# Altium PCB PES_BOARD_V2023.PcbDoc (part 2 of 3)
Units mm, origin at the board's own origin, x right, y up, seen from the top; angles counter-clockwise.
Board outline 110.62 x 70.82 mm, 2 copper layers (Top Layer, Bottom Layer), stack 0.325 mm thick; 197 components, 152 nets, 714 pads, 351 vias.
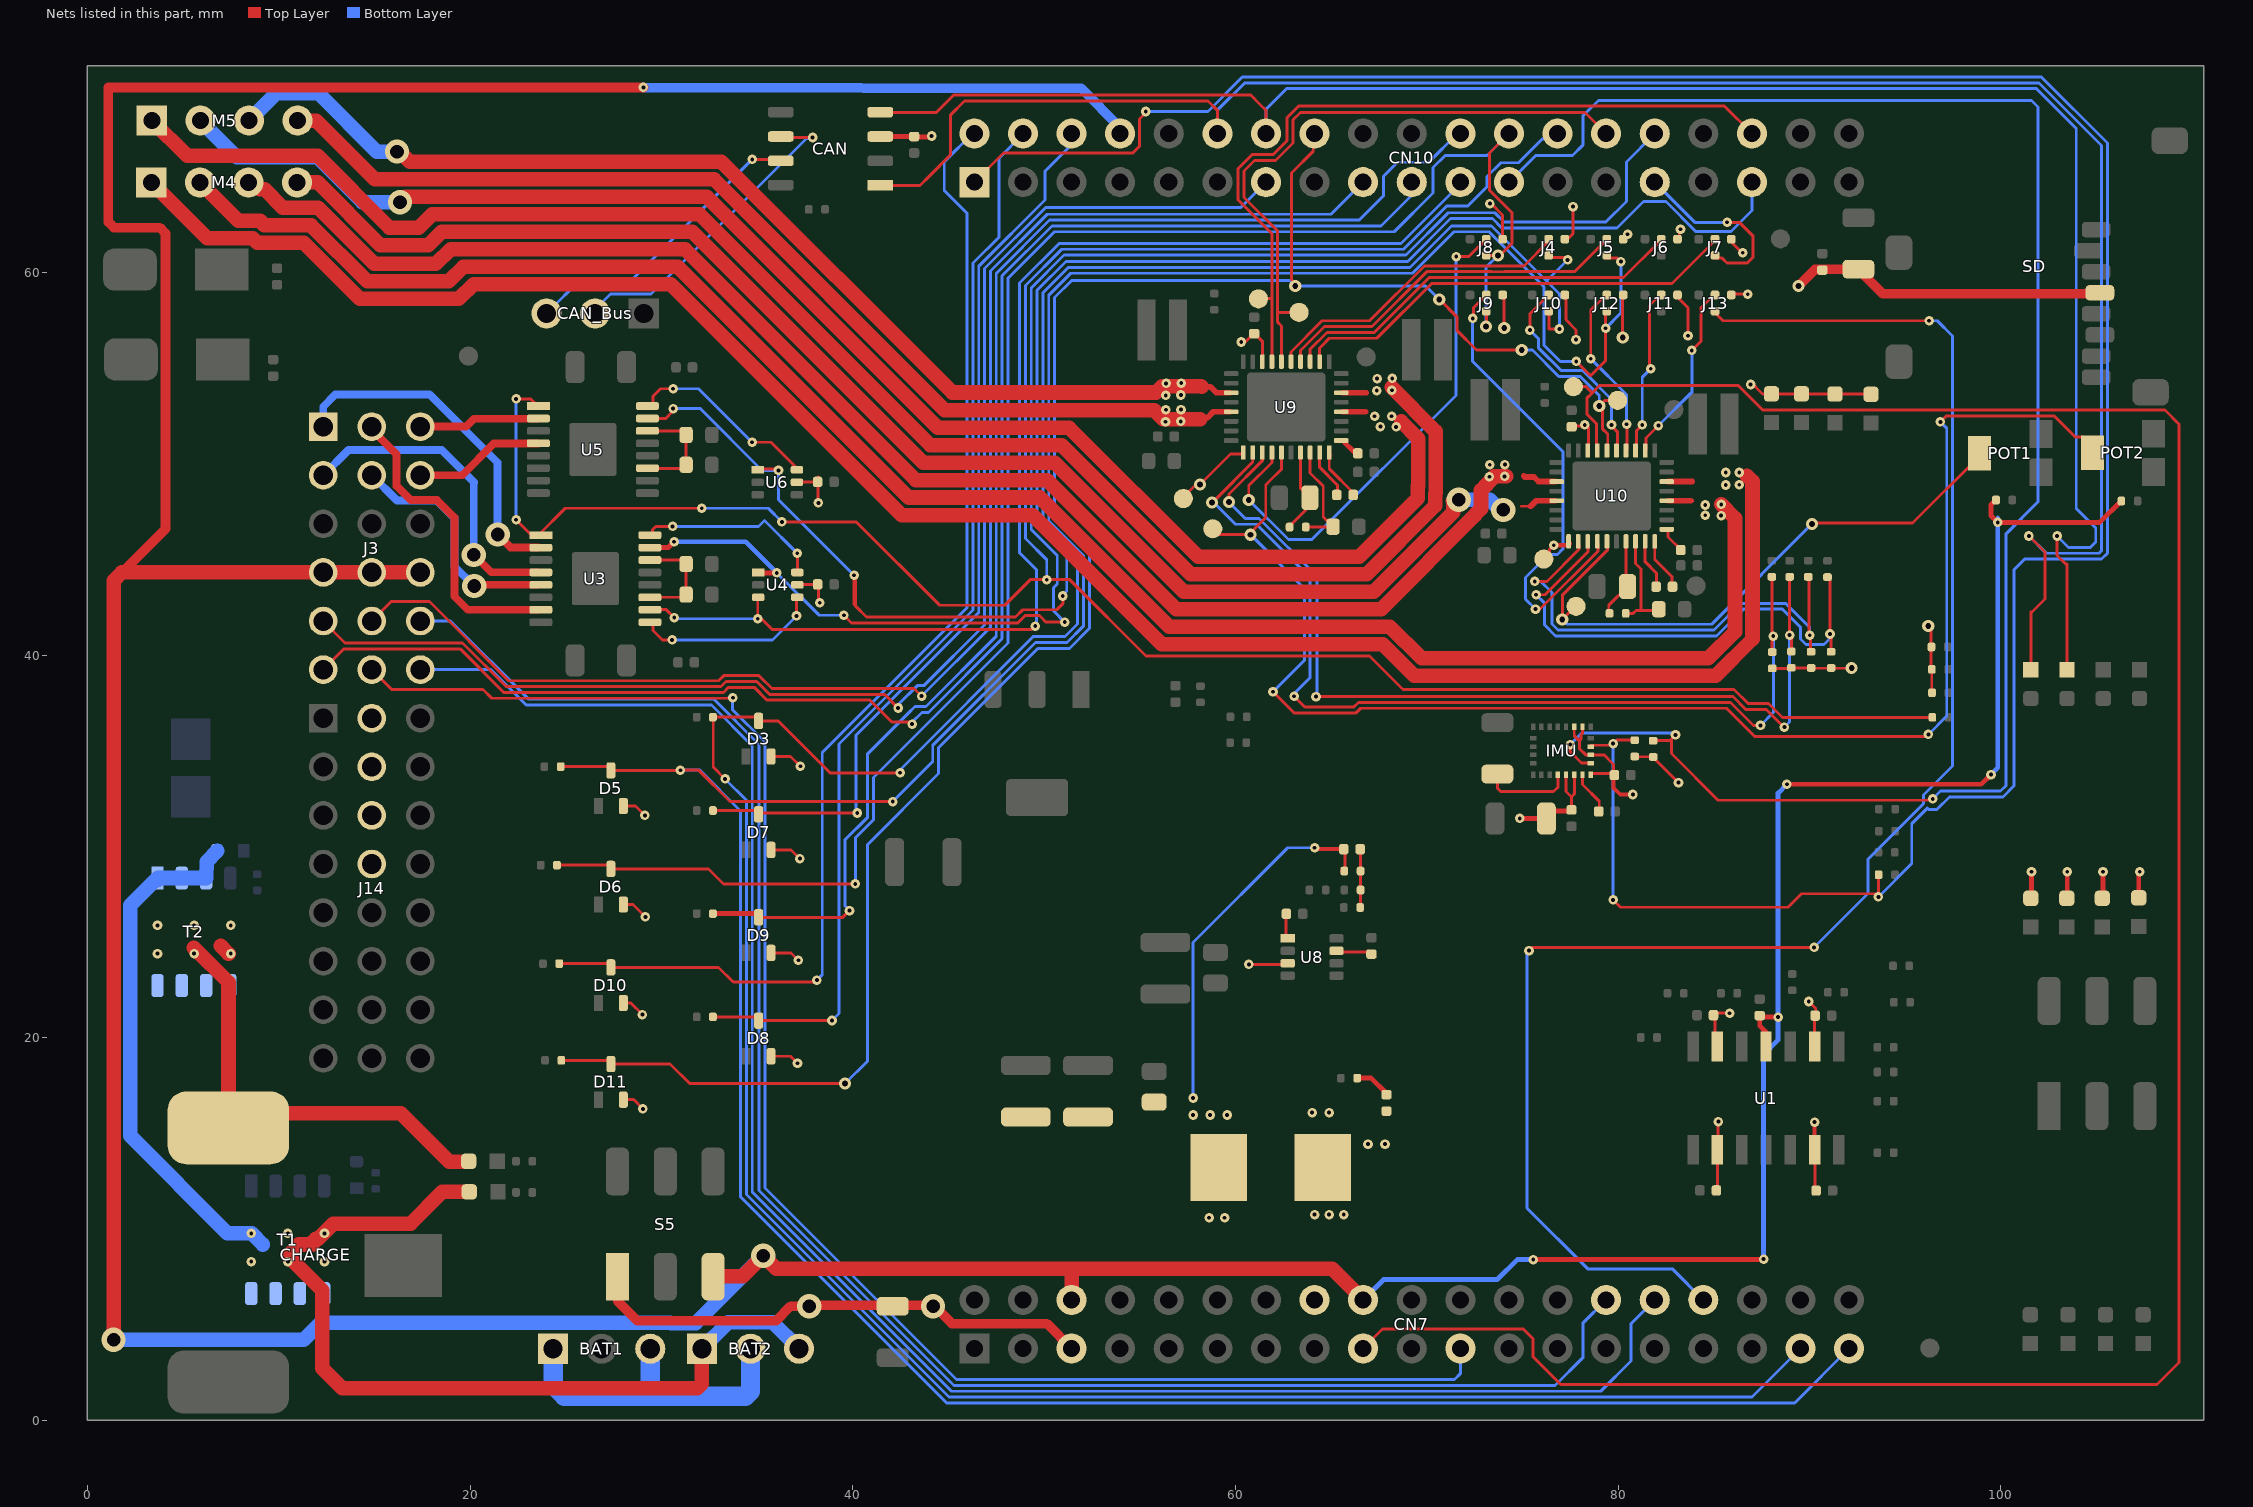
[diagram p2: the nets of this part, all layers, seen from the top]

## Part data (continued)
U9 U10: library part CMP-00364-3, "Stepper Motor Driver, 1Ch, 3..5.5V, Power 4.75..46V, 2A, QFN-36", Case/Package=QFN-36, Max Current=2A, Max Logic Voltage=5.25V, Max Power Voltage=46V, Min Logic Voltage=3V, Min Power Voltage=5.5V, Channels=1, Function="Stepper Motor Driver", Mounting Technology=SMD
ZD1 ZD2: library part CMP-004-00080-9, "Zener Diode, 13.25V±0.85V, 5mA, 30R, 500mW, SOD-523-2", Case/Package=SOD-523-2, Current=100nA, Power=500mW, Voltage=13.25V, Mounting Technology=SMD, Type=Zener

## Via types
v1: diameter 0.5, hole 0.2, Top Layer to Bottom Layer, 294 vias
v2: diameter 0.635, hole 0.305, Top Layer to Bottom Layer, 30 vias
v3: diameter 1.27, hole 0.711, Top Layer to Bottom Layer, 23 vias
v4: diameter 4.5, hole 3.5, Top Layer to Bottom Layer, 3 vias
v5: diameter 0.5, hole 0.2, Top Layer to Bottom Layer, tented both sides, 1 vias

## Nets (pads, with @x,y where several pads share a name; then routed paths per layer and width w, separated by ;. In a path a pad name is that pad's centre, name@x,y a point inside that pad or via, vN(x,y) a via of type N, cw(c..) or ccw(c..) an arc to the next point about the centre after c; other vN are vias at no path point)
3V3: 8_VCC_IO.1 8_VCC_IO_2.1 "DRV ERR 1.2" "DRV ERR 2.2" "IMU SDA.2" "IND PLS 1.2" "IND PLS 2.2" "SD CS.2" "SD MISO.2" "SD MOSI.2" C2.2 C11.1 C12.2 C13.1 C15.2 C19.1 C25.1 C36.1 C37.1 C48.1 C49.1 C50.1 C52.1 C61.1 C202.1 CAN.3 CN7.5 CN7.16 D3.2 D5.2 D6.2 D7.2 D8.2 D9.2 D10.2 D11.2 IMU.1 IMU.3 IMU.7 IMU.8 IMU.22 IMU.23 J4.4 J5.4 J6.4 J7.4 J8.4 J9.4 J10.4 J11.4 J12.4 J13.4 J14.2 J14.5 J14.8 J14.11 R2.2 R3.1 R7.2 R19.1 R21.1 R33.1 R34.1 R65.1 R66.1 S5.1 SD.4 U1.2 U1.6 U1.9 U1.13 U4.5 U6.5 U9.8 U9.19 U10.8 U10.19 | length 137.1
  Top Layer w0.152: D11.2@28.006,16.766 28.547,16.766 v1(29.032,16.281) ; D10.2@28.006,21.82 28.396,21.82 v1(29.007,21.209) ; D6.2@28.006,26.968 28.506,26.968 v1(29.159,26.314) ; D5.2@28.006,32.115 28.641,32.115 v1(29.134,31.623) ; D8.2@35.727,19.034 36.744,19.034 v1(37.109,18.669) ; D9.2@35.727,24.437 36.777,24.437 v1(37.16,24.054) ; D7.2@35.727,29.822 36.777,29.822 v1(37.236,29.362) ; D3.2@35.727,34.706 36.744,34.706 v1(37.262,34.188) ; U4.5@37.102,43.671 37.127,43.697 C19.1@38.161,43.697 38.216,43.643 38.216,42.789 v1(38.27,42.735) ; U6.5@37.127,49.056 38.191,49.056 v1@38.191,47.965 ; C25.1@38.191,49.312 C25.1@38.202,49.301 ; 8_VCC_IO.1@57.362,48.343 57.941,48.921 v2(58.151,48.921) 59.746,50.515 U9.19@60.405,50.515 ; v1(60.305,56.365) 60.51,56.365 60.98,56.835 61.405,56.41 U9.8@61.405,55.416 ; v1(73.301,63.599) 73.374,63.599 73.962,63.011 J8.4@73.962,61.74 ; v2(74.047,57.103) J9.4@74.047,58.821 ; 8_VCC_IO_2.1@76.424,45.015 76.424,45.534 v1(76.635,45.745) ; J10.4@77.271,58.825 77.271,57.534 77.807,56.998 77.807,56.487 v1(77.8,56.495) ; J4.4@77.272,61.655 77.645,62.028 v1(77.645,63.445) ; IMU.22@77.283,33.743 77.283,32.874 77.566,32.591 ; C13.1@77.566,31.879 77.566,32.591 ; C61.1@77.574,51.966 78.394,51.966 78.449,51.911 78.449,50.747 U10.8@78.46,50.736 ; IMU.8@77.711,36.204 77.711,35.784 77.975,35.52 ; IMU.23@77.713,33.743 77.713,32.738 77.566,32.591 ; IMU.7@78.141,36.204 78.141,35.914 78.062,35.835 78.062,35.608 77.975,35.52 ; IMU.1@78.571,33.804 C11.1@79.762,33.804 ; C11.1@79.762,33.623 C11.1@79.762,33.804 ; J5.4@80.192,61.635 80.495,61.938 v1(80.495,61.995) ; v2(80.241,56.607) J12.4@80.241,58.825 ; R34.1@80.869,34.689 R33.1@81.805,34.689 ; R33.1@81.831,34.663 v1(83.16,33.334) ; J6.4@83.044,61.635 83.198,61.788 83.198,62.196 v1(83.264,62.262) ; J11.4@83.081,58.825 83.081,58.726 83.656,58.151 v1(83.656,56.695) ; C50.1@85.057,21.184 85.158,21.285 v1(85.827,21.285) ; U1.6@85.065,19.448 C50.1@85.065,21.107 ; C202.1@85.192,12.105 U1.9@85.192,13.928 ; U1.9@85.217,14.164 v1@85.217,15.596 ; J7.4@85.887,61.626 86.478,61.035 v1(86.515,61.035) ; J13.4@85.892,58.825 85.932,58.865 v1(86.775,58.865) ; v1(86.925,54.145) 86.925,54.285 87.555,53.655 88.015,53.655 89.585,53.655 91.325,53.655 91.335,53.645 93.212,53.645 93.224,53.633 ; R66.1@88.055,39.295 89.025,39.295 89.055,39.325 90.078,39.325 90.088,39.315 92.199,39.315 v2(92.209,39.325) ; v1(89.967,21.895) 90.33,21.531 C49.1@90.33,21.184 ; U1.2@90.272,19.448 C49.1@90.272,21.125 ; U1.13@90.297,14.164 90.297,12.232 C48.1@90.507,12.023 ; v2(96.215,41.525) 96.365,41.375 96.365,39.275 96.395,39.245 R3.1@96.395,38.035 ; 77.975,35.52 77.975,35.124 77.973,35.122 78.306,34.789 79.257,34.789 79.762,34.284 C11.1@79.762,33.804
  Top Layer w0.203: C13.1@77.566,31.854 C13.1@77.566,31.879 ; C11.1@79.762,33.623 79.762,33.064 80.112,32.715 v1(80.772,32.715) ; C202.1@85.109,12.023 85.192,12.105 C202.1@85.202,12.116 ; U1.13@90.272,13.928 v1(90.272,15.596) ; C48.1@90.422,11.938 C48.1@90.507,12.023
  Top Layer w0.25: v1(74.858,31.463) 76.259,31.463 76.678,31.854 C13.1@77.565,31.854
  Top Layer w0.254: CAN.3@41.322,67.253 41.347,67.192 41.386,67.1 C15.2@43.231,67.1 ; C15.2@43.205,67.075 44.063,67.075 v1(44.12,67.132) ; v1(76.635,45.745) 77.369,45.745 U10.19@77.46,45.836 ; U1.9@85.192,13.928 U1.9@85.319,14.055 ; v1@85.217,15.596 v1(85.242,15.621) ; 101.575,27.293 101.608,27.327 v1(101.608,28.679) ; v1@103.403,28.727 v1@103.409,28.722 ; 103.454,27.293 103.476,27.316 v1(103.476,28.679) ; 105.308,27.293 105.344,27.329 v1(105.344,28.679) ; 107.213,27.318 v1@107.213,28.626
  Top Layer w0.508: S5.1@27.728,6.883 27.728,6.227 28.751,5.204 35.988,5.204 36.754,5.969 v3(37.719,5.969) ; v3@37.719,6.02 44.145,6.02 v3(44.196,5.969) 44.272,5.969 45.187,5.055 50.14,5.055 CN7.5@51.435,3.759 ; v2(89.425,59.285) 90.295,60.155 90.675,60.155 90.685,60.165 92.561,60.165 93.831,58.895 105.141,58.895 SD.4@105.185,58.939
  Bottom Layer w0.152: v1(77.8,56.495) 77.835,56.53 v1@77.835,56.555
  other v1: 107.264,28.677 38.202,47.955 78.255,52.035
5V: C6.2 C20.1 C26.2 C27.2 C28.2 CN7.6 CN7.18 CN10.8 J3.10 J3.11 J3.12 L3.2 R6.2 R36.1 R37.1 S5.3 U1.4 | length 313.7
  Top Layer w0.152: R6.2@65.735,28.834 C6.2@65.735,29.858
  Top Layer w0.203: v1@64.211,29.858 C6.2@65.735,29.858
  Top Layer w0.254: v1(64.135,29.934) v1@64.211,29.858 ; R6.2@65.59,28.689 R6.2@65.735,28.834 ; v1(75.565,8.407) 87.579,8.407 v1(87.605,8.433) ; U1.4@87.732,19.448 87.732,20.295 87.401,20.625 87.401,21.09 88.359,21.09 v1(88.367,21.082) ; v1(88.824,33.249) 98.984,33.249 v1(99.492,33.757) ; R36.1@99.738,48.108 99.492,47.862 99.492,47.295 v1(99.847,46.939) 105.173,46.939 R37.1@106.291,48.057
  Top Layer w0.508: 1.803,44.323 4.08,46.6 4.08,62.046 3.782,62.343 1.39,62.343 1.092,62.641 1.092,69.672 4.831,69.672 ; 4.882,69.672 v1(29.058,69.672)
  Top Layer w0.762: v3(1.365,4.22) 1.365,43.885 1.803,44.323 J3.10@12.319,44.323 J3.11@14.859,44.323 J3.12@17.399,44.323 ; S5.3@32.686,7.544 34.259,7.544 v3(35.325,8.611) 36.011,7.925 51.486,7.925 ; CN7.6@51.435,6.299 51.435,7.874 51.486,7.925 ; CN7.18@66.675,6.299 65.049,7.925 51.486,7.925
  Bottom Layer w0.152: v1(57.785,16.853) 57.785,24.981 62.738,29.934 v1(64.135,29.934)
  Bottom Layer w0.254: CN7.18@66.675,6.299 67.742,7.366 73.685,7.366 74.727,8.407 v1(75.565,8.407) ; v1(87.605,8.433) 87.605,19.126 88.367,19.888 v1(88.367,21.082) 88.367,32.791 v1(88.824,33.249) ; v1(99.492,33.757) 99.847,34.112 v1(99.847,46.939) v1@99.847,47.167
  Bottom Layer w0.508: v1(29.058,69.672) 51.943,69.621 53.975,67.589 CN10.8@53.975,67.259
  Bottom Layer w0.762: v3(1.365,4.22) 11.3,4.22 12.185,5.105 30.462,5.105 30.49,5.077 31.779,5.077 35.325,8.623 v3@35.325,8.636
  other v1: 58.623,10.592 59.436,10.592 57.785,15.964 58.674,15.964 59.563,15.964
AIN_Iref1: 23_AIN_IREF.1 POT2.2 U9.23 | length 78.4
  Top Layer w0.152: 23_AIN_IREF.1@58.836,46.605 59.146,46.295 60.682,46.295 61.586,47.199 61.586,48.896 61.76,49.07 61.762,49.07 62.405,49.713 U9.23@62.405,50.515 ; v1(61.965,38.085) 63.067,36.983 66.311,36.983 66.552,37.224 85.67,37.224 87.138,35.756 96.119,35.756 v1(96.218,35.855) ; v1(96.845,52.192) 97.162,52.509 102.79,52.509 103.899,51.399 104.261,51.399 104.935,50.725 POT2.2@104.935,50.575
  Bottom Layer w0.152: v2(60.796,46.295) 63.602,43.49 63.602,39.721 v1(61.965,38.085) ; v1(96.218,35.855) 97.18,36.818 97.18,51.857 v1(96.845,52.192)
AIN_Iref2: 23_AIN_IREF_2.1 POT1.2 U10.23 | length 31.8
  Top Layer w0.152: 23_AIN_IREF_2.1@77.825,42.551 77.781,42.551 v2(77.085,41.855) 77.085,43.134 79.46,45.508 U10.23@79.46,45.837 ; v2(90.127,46.849) 90.182,46.904 95.394,46.904 POT1.2@99.045,50.555
  Bottom Layer w0.152: v2(77.085,41.855) 77.326,41.614 84.892,41.614 v2(90.127,46.849)
Analog0: CN7.35 D3.3 J4.3 J10.3 R51.1 | length 163.6
  Top Layer w0.152: v1(33.325,33.528) 32.706,34.147 32.706,36.761 34.882,36.761 D3.3@35.077,36.566 36.094,36.566 38.81,33.85 v1(42.473,33.85) ; J10.3@76.391,57.945 76.391,57.048 76.395,57.045 v1(76.935,57.045) ; J4.3@76.392,60.775 77.245,60.775 v1(77.365,60.655)
  Bottom Layer w0.152: v1(33.325,33.528) 34.442,32.41 34.442,11.813 45.036,1.219 86.995,1.219 CN7.35@89.535,3.759 ; v1(42.473,33.85) 42.54,33.916 42.54,34.08 49.434,40.974 51.086,40.974 51.745,41.633 51.745,45.078 49.939,46.884 49.939,58.941 51.264,60.266 69.128,60.266 70.618,61.756 71.295,62.433 73.384,62.433 76.263,59.554 ; v1(76.935,57.045) 76.935,58.882 76.263,59.554 ; v1(77.365,60.655) 77.364,60.655 76.263,59.554
Analog1: CN7.37 D5.3 J5.3 J12.3 R49.1 | length 181.2
  Top Layer w0.152: R49.1@24.748,34.17 27.161,34.17 D5.3@27.356,33.975 v1@30.978,33.975 ; v1(30.988,33.985) 31.945,33.985 33.585,32.345 v1(42.085,32.345) ; v1(77.811,55.349) 78.555,54.605 79.351,55.401 v1(79.351,57.085) 79.351,57.935 J12.3@79.361,57.945 ; J5.3@79.312,60.755 79.961,60.755 v1(80.145,60.571)
  Bottom Layer w0.152: v1(30.988,33.985) 32.004,33.985 34.138,31.852 34.138,11.687 44.91,0.914 89.23,0.914 CN7.37@92.075,3.759 ; v1(42.085,32.345) 44.18,34.44 44.18,35.289 49.546,40.655 51.198,40.655 52.05,41.507 52.05,45.205 50.244,47.01 50.244,58.815 51.39,59.962 69.254,59.962 71.421,62.128 73.258,62.128 76.135,59.251 76.135,56.195 76.981,55.349 v1(77.811,55.349) ; v1(79.351,57.085) 80.145,57.879 v1(80.145,60.571)
Analog2: CN10.6 D7.3 R41.1 | length 48.1
  Top Layer w0.152: R41.1@32.706,31.877 34.882,31.877 34.95,31.914 35.146,31.807 35.204,31.775 35.229,31.75 v1(40.234,31.75) ; CN10.6@51.435,67.259 CN10.6@51.435,67.564
  Bottom Layer w0.152: v1(40.234,31.75) 40.17,31.813 40.17,35.812 46.586,42.228 46.586,60.33 50.05,63.794 50.05,65.294 51.435,66.679 CN10.6@51.435,67.259
Analog3: CN10.24 D6.3 J8.3 J9.3 R10.1 | length 94
  Top Layer w0.152: R10.1@24.553,29.023 27.161,29.023 D6.3@27.356,28.828 32.463,28.828 33.249,28.042 v1(40.132,28.042) ; v2(73.102,57.185) 73.112,57.196 J9.3@73.112,57.975 ; J8.3@73.112,60.89 v2(73.723,60.89) 73.82,60.89 74.452,61.522 74.452,63.126 73.279,64.298 73.279,66.243 CN10.24@74.295,67.259
  Bottom Layer w0.152: v1(40.132,28.042) 40.132,30.445 41.084,31.398 41.084,33.607 48.11,40.632 48.11,59.699 50.54,62.128 68.301,62.128 70.333,64.16 70.333,65.481 70.968,66.116 73.152,66.116 CN10.24@74.295,67.259 ; v2(73.102,57.185) 73.102,60.269 v2(73.723,60.89)
CAN_H: CAN.7 CAN_Bus.3 | length 15.5
  Top Layer w0.152: v1(34.747,65.913) CAN.7@36.11,65.913
  Bottom Layer w0.152: CAN_Bus.3@23.994,57.861 25.832,59.699 28.533,59.699 v1(34.747,65.913)
CAN_L: CAN.6 CAN_Bus.2 | length 17
  Top Layer w0.152: CAN.6@36.237,67.056 v1(37.897,67.056)
  Bottom Layer w0.152: CAN_Bus.2@26.534,57.861 26.534,58.068 27.343,58.877 29.451,58.877 37.577,67.003 37.844,67.003 v1(37.897,67.056)
CAN_RX: "CAN RX.1" CAN.4 CN10.14 | length 98.7
  Top Layer w0.152: CAN.4@41.412,68.352 44.35,68.352 45.264,69.266 60.808,69.266 61.29,68.783 61.595,68.478 CN10.14@61.595,67.259 ; v1(102.946,46.228) 102.946,45.212 103.404,44.754 103.467,44.754 103.467,39.231
  Bottom Layer w0.152: CN10.14@61.595,67.259 61.595,68.529 62.671,69.605 101.868,69.605 103.95,67.524 103.95,47.663 104.965,46.647 104.965,45.913 104.683,45.631 103.543,45.631 v1(102.946,46.228)
CAN_TX: "CAN TX.1" CAN.1 CN10.12 | length 104.6
  Top Layer w0.152: CAN.1@41.412,64.542 43.507,64.542 43.993,65.028 45.099,66.134 45.099,68.215 45.844,68.961 58.572,68.961 59.055,68.478 CN10.12@59.055,67.259 ; v1(101.473,46.228) 102.311,45.39 102.311,42.926 101.613,42.227 101.575,42.266 101.575,39.231
  Bottom Layer w0.152: CN10.12@59.055,67.259 59.055,68.478 60.487,69.91 101.994,69.91 105.27,66.634 105.27,45.453 105.143,45.326 102.375,45.326 v1(101.473,46.228)
CS1: CN10.29 J7.3 | length 9.7
  Top Layer w0.152: J7.3@85.007,60.746 85.442,60.746 85.699,60.489 86.741,60.489 86.771,60.518 86.785,60.518 86.778,60.526 87.061,60.809 87.061,61.895 86.334,62.622 v1(85.7,62.622)
  Bottom Layer w0.152: CN10.29@81.915,64.719 84.012,62.622 v1(85.7,62.622)
CS2: CN7.32 J13.3 | length 87.6
  Top Layer w0.152: v1(75.345,24.555) 75.515,24.725 v1(90.245,24.725) ; J13.3@85.012,57.945 85.482,57.475 v1(96.255,57.475)
  Bottom Layer w0.152: v1(75.345,24.555) 75.245,24.455 75.245,11.095 78.415,7.925 82.829,7.925 CN7.32@84.455,6.299 ; v1(90.245,24.725) 93.06,27.54 93.06,29.33 95.965,32.236 95.965,32.685 97.485,34.205 97.485,56.674 96.684,57.475 v1(96.255,57.475)
Digital0: CN10.22 D9.3 R59.1 | length 71.8
  Top Layer w0.152: D9.3@35.077,26.297 39.477,26.297 v1(39.827,26.648)
  Top Layer w0.254: R59.1@32.706,26.492 D9.3@34.882,26.492
  Bottom Layer w0.152: v1(39.827,26.648) 39.827,26.669 39.586,26.911 39.586,30.33 40.78,31.524 40.78,34.846 42.897,36.963 43.246,37.312 43.826,37.312 47.501,40.987 47.501,59.951 50.288,62.738 66.471,62.738 67.742,64.009 67.742,65.024 68.478,65.761 70.109,65.761 CN10.22@71.608,67.259
Digital1: CN10.2 D10.3 R57.1 | length 62.5
  Top Layer w0.152: R57.1@24.672,23.875 27.161,23.875 D10.3@27.356,23.68 32.987,23.68 33.757,22.911 38.075,22.911 v1@38.125,22.962
  Bottom Layer w0.152: v1(38.125,23.012) 38.405,23.292 38.405,34.908 45.974,42.478 45.974,63.094 44.78,64.287 44.78,65.786 CN10.2@46.304,67.31
Digital2: CN10.4 D8.3 R55.1 | length 56.9
  Top Layer w0.152: R55.1@32.706,21.089 34.882,21.089 D8.3@35.077,20.894 35.189,21.006 35.29,20.904 v1(38.913,20.904)
  Bottom Layer w0.152: v1(38.913,20.904) 39.281,21.273 39.281,35.354 46.282,42.354 46.282,60.49 47.65,61.859 47.65,65.989 48.895,67.234 CN10.4@48.895,67.259
Digital3: 6_STEP_2.1 CN10.16 D11.3 R8.1 U10.6 | length 107.8
  Top Layer w0.152: R8.1@24.781,18.821 27.161,18.821 D11.3@27.356,18.626 30.454,18.626 31.475,17.605 v2(39.595,17.605) ; v2(63.125,59.295) 63.125,59.426 62.93,59.621 62.93,65.194 64.068,66.332 64.068,67.192 CN10.16@64.135,67.259 ; v2(70.655,58.585) 70.678,58.585 71.573,57.69 71.573,56.977 72.595,55.955 74.955,55.955 v2(74.965,55.945) ; U10.6@79.46,50.736 79.46,51.553 79.176,51.837 79.176,52.864 v2(79.015,53.025) 79.305,53.315 6_STEP_2.1@79.995,53.315
  Bottom Layer w0.152: v2(39.595,17.605) 40.78,18.79 40.78,30.106 44.485,33.811 44.485,35.162 49.672,40.35 51.324,40.35 52.38,41.406 52.38,45.306 50.549,47.137 50.549,58.689 51.445,59.585 62.835,59.585 v2(63.125,59.295) 69.945,59.295 v2(70.655,58.585) ; v2(74.965,55.945) 75.523,55.945 76.902,54.566 78.023,54.566 79.015,53.574 v2(79.015,53.025)
ENC_A1: CN10.13 J3.13 | length 73.9
  Top Layer w0.152: J3.13@12.319,41.783 13.467,40.635 19.608,40.635 21.886,38.357 33.115,38.357 33.379,38.621 34.979,38.621 35.648,37.951 41.654,37.951 v1@42.458,37.148
  Bottom Layer w0.152: v1(42.367,37.236) 42.434,37.303 42.434,37.465 43.373,38.404 43.715,38.404 46.891,41.581 46.891,60.204 50.073,63.385 60.261,63.385 CN10.13@61.595,64.719
ENC_A2: CN10.17 J3.14 | length 76.5
  Top Layer w0.152: J3.14@14.859,41.783 15.875,42.799 17.875,42.799 22.012,38.662 32.989,38.662 33.252,38.925 35.105,38.925 35.774,38.256 43.202,38.256 v1(43.599,37.858)
  Bottom Layer w0.152: v1(43.599,37.858) 47.196,41.455 47.196,60.078 50.161,63.043 64.999,63.043 CN10.17@66.675,64.719
ENC_A3: CN7.28 J3.15 | length 95.6
  Bottom Layer w0.152: J3.15@17.399,41.783 18.974,41.783 23.063,37.694 32.741,37.694 35.103,35.331 35.103,12.015 45.289,1.829 76.708,1.829 78.156,3.277 78.156,5.08 CN7.28@79.375,6.299 CN7.28@79.883,6.299
ENC_B1: CN10.19 J3.16 | length 82.9
  Top Layer w0.152: J3.16@12.319,39.243 13.407,40.331 19.481,40.331 21.759,38.052 33.242,38.052 33.505,38.316 34.852,38.316 35.522,37.647 40.907,37.647 42.042,36.512 43.104,36.512 v1(43.104,36.398)
  Bottom Layer w0.152: v1(43.104,36.398) 43.104,36.5 43.611,37.007 43.952,37.007 47.806,40.861 47.806,59.825 50.414,62.433 67.614,62.433 69.465,64.284 69.465,64.719 CN10.19@69.215,64.719
ENC_B2: CN7.21 J3.17 | length 88.4
  Top Layer w0.152: J3.17@14.859,39.243 15.9,38.202 20.676,38.202 21.13,37.748 33.709,37.748 v1(33.731,37.77)
  Bottom Layer w0.152: v1(33.731,37.77) v1@33.706,37.77 ; CN7.21@71.755,3.759 71.755,2.443 71.446,2.134 45.415,2.134 35.408,12.141 35.408,35.458 33.706,37.159 v1@33.706,37.77 ; v1@33.706,37.77 33.706,37.954 33.522,37.77 v1@33.706,37.77
ENC_B3: CN7.30 J3.18 | length 96.9
  Bottom Layer w0.152: J3.18@17.399,39.243 21.083,39.243 22.937,37.389 32.614,37.389 34.747,35.256 34.747,11.939 45.163,1.524 79.096,1.524 80.67,3.099 80.67,5.055 CN7.30@81.915,6.299
GND_1: BAT1.1 BAT1.3 BAT2.2 | length 17.3
  Bottom Layer w1.016: BAT1.1@24.335,3.749 24.335,1.865 24.93,1.27 29.415,1.27 ; BAT1.3@29.415,3.749 29.415,1.27 ; BAT2.2@34.655,3.749 34.655,1.533 34.392,1.27 29.415,1.27
GND_BAT: BAT2.1 BAT2.3 LED2.2 T1.5 T1.6 T1.7 T1.8 T2.1 T2.2 T2.3 ZD1.2 | length 73.6
  Top Layer w0.762: 14.259,10.286 12.85,10.286 12.045,9.481 11.934,9.481 11.76,9.307 11.76,9.196 11.049,9.196 10.465,8.612 12.265,6.812 12.265,2.725 13.314,1.676 31.865,1.676 32.115,1.926 BAT2.1@32.115,3.749 ; 14.259,10.286 16.884,10.286 18.548,11.95 LED2.2@19.955,11.95
  Bottom Layer w0.762: T2.3@6.175,28.35 T2.2@4.93,28.35 T2.1@3.66,28.35 3.66,28.242 3.552,28.242 2.226,26.916 2.226,14.881 7.317,9.789 8.577,9.789 9.17,9.196 ; T2.3@6.2,28.35 6.226,29.211 ZD1.2@6.785,29.77 ; BAT2.1@32.115,3.749 33.505,5.139 35.805,5.139 BAT2.3@37.195,3.749
  other v1: 8.56,8.3 10.474,8.3 12.387,8.3 8.56,9.773 10.474,9.773 12.387,9.773
GND_Charge: CHARGE.2 LED1.2 T2.5 T2.6 T2.7 T2.8 | length 24.4
  Top Layer w0.762: 5.565,24.712 7.37,22.907 CHARGE.2@7.37,16.053 ; 6.956,24.812 v1@7.37,24.398 ; CHARGE.2@7.37,15.293 CHARGE.2@7.37,16.053 ; LED1.2@19.925,13.545 19.903,13.523 18.903,13.523 16.374,16.053 CHARGE.2@7.37,16.053
  other v1: 3.66,24.4 5.574,24.4 7.487,24.4 3.66,25.873 5.574,25.873 7.487,25.873
IMU_SCL: CN10.23 IMU.2 R33.2 | length 94.8
  Top Layer w0.152: v1(77.496,35.322) 77.496,34.954 78.091,34.359 IMU.2@78.516,34.359 ; R33.2@81.831,35.543 82.713,35.543 ; v1(83.002,35.831) 82.787,35.616 82.787,35.543 82.787,34.855 85.225,32.417 96.181,32.417 96.184,32.42 96.377,32.42 v1(96.444,32.487)
  Bottom Layer w0.152: CN10.23@74.295,64.719 75.692,66.116 77.618,66.116 78.156,66.654 78.156,68.174 78.978,68.996 101.616,68.996 101.956,68.656 101.956,48.012 100.286,46.342 100.286,33.184 99.995,32.893 96.85,32.893 v1(96.444,32.487) ; v1(77.496,35.322) 78.096,35.922 82.911,35.922 v1(83.002,35.831)
IMU_SDA: CN10.1 IMU.4 R29.2 R34.2 | length 138.7
  Top Layer w0.152: CN10.1@46.355,64.719 47.066,65.43 47.879,66.243 54.638,66.243 54.991,66.596 54.991,68.021 55.347,68.377 v1(55.308,68.415) ; IMU.4@78.587,35.29 79.654,35.29 v1(79.74,35.376) 79.933,35.569 R34.2@80.869,35.569 ; v1(79.74,27.203) 80.121,26.822 88.875,26.822 89.582,27.529 93.44,27.529 v1(93.606,27.363) R29.2@93.606,28.524
  Bottom Layer w0.152: v1(55.308,68.415) 58.56,68.415 60.361,70.215 102.121,70.215 105.575,66.761 105.575,45.327 105.27,45.021 101.257,45.021 100.686,44.45 100.686,33.153 100.121,32.588 97.318,32.588 96.67,31.941 96.218,31.941 96.159,31.999 95.352,31.191 95.352,29.109 v1(93.606,27.363) ; v1(79.74,27.203) v1(79.74,35.376)
M1+: J3.1 U3.2 | length 18.1
  Top Layer w0.406: v3(21.438,46.304) 22.115,45.627 U3.2@23.552,45.627
  Bottom Layer w0.406: J3.1@12.319,51.943 12.319,52.984 12.954,53.619 17.882,53.619 21.438,50.063 v3(21.438,46.304)
M1-: J3.4 U3.4 | length 16.7
  Top Layer w0.406: v3(20.193,45.237) 21.104,44.327 U3.4@23.552,44.327
  Bottom Layer w0.406: J3.4@12.319,49.403 13.64,50.724 18.517,50.724 20.218,49.022 20.193,48.997 v3(20.193,45.237)
M1_CFG_0: J4.1 U9.5 | length 16.4
  Top Layer w0.152: U9.5@62.903,55.387 62.903,55.85 64.527,57.475 67.005,57.475 69.875,60.345 73.497,60.345 ; 73.497,60.344 73.95,60.344 ; 73.95,60.345 75.084,60.345 76.392,61.654 J4.1@76.392,61.655
M1_CFG_1: J5.1 U9.4 | length 19
  Top Layer w0.152: U9.4@63.402,55.388 63.402,55.919 64.653,57.17 67.134,57.17 70.004,60.04 73.37,60.04 ; 73.371,60.04 74.076,60.04 ; 74.076,60.04 77.719,60.04 79.314,61.635 J5.1@79.456,61.635
M1_CFG_2: J6.1 U9.3 | length 21.2
  Top Layer w0.152: U9.3@63.903,55.387 63.903,55.988 64.78,56.865 67.26,56.865 70.13,59.735 73.244,59.735 ; 73.245,59.735 74.202,59.735 ; 74.203,59.735 80.284,59.735 J6.1@82.174,61.626
M1_CFG_3: J7.1 U9.2 | length 23.6
  Top Layer w0.152: U9.2@64.402,55.388 64.392,55.397 64.392,56.043 64.72,56.37 64.72,56.375 64.906,56.561 67.386,56.561 70.256,59.431 73.118,59.431 ; 73.118,59.43 74.328,59.43 ; 74.329,59.431 82.812,59.431 J7.1@85.007,61.626
M1_CFG_6: J8.1 U9.22 | length 27.3
  Top Layer w0.152: v2(60.695,48.115) 60.695,48.865 61.904,50.074 U9.22@61.904,50.515 ; v1(71.545,60.828) 72.199,60.828 J8.1@73.112,61.74
  Bottom Layer w0.152: v2@60.485,48.115 v2(60.695,48.115) 62.771,46.039 63.989,46.039 71.525,53.575 71.525,60.685 71.395,60.815 71.408,60.828 v1(71.545,60.828)
M1_DIR1: 7_M1_DIR.1 CN10.34 U9.7 | length 41
  Top Layer w0.152: 7_M1_DIR.1@61.225,58.622 61.248,58.645 61.903,58.645 ; U9.7@61.903,55.387 61.903,58.645 ; CN10.34@86.995,67.259 85.549,68.705 64.282,68.705 63.305,68.705 62.705,68.105 62.705,66.898 61.965,66.158 60.871,66.158 60.145,65.432 60.145,63.792 61.903,62.035 61.903,58.645
M1_Driver_error: R66.2 R68.2 U9.20 | length 50.8
  Top Layer w0.152: v2@58.757,48.175 58.993,48.175 60.904,50.086 U9.20@60.904,50.515 ; v1(63.065,37.851) 63.629,37.287 66.185,37.287 66.426,37.529 85.871,37.529 87.075,36.325 v1(87.445,36.325) ; R68.2@88.041,44.072 88.041,41.069 v1(88.115,40.995) 88.055,40.935 R66.2@88.055,40.175
  Bottom Layer w0.152: v2(58.775,47.985) 58.855,47.985 59.999,46.841 61.107,46.841 63.906,44.041 63.906,38.825 63.065,37.984 v1(63.065,37.851) ; v1(87.445,36.325) 88.115,36.995 v1(88.115,40.995)
M1_Index_pulse: R65.2 R67.2 U9.21 | length 49.8
  Top Layer w0.152: v2(59.665,47.995) 59.665,48.416 61.405,50.156 U9.21@61.405,50.515 ; U9.21@61.373,50.458 U9.21@61.403,50.487 ; v1(64.211,37.834) 86.006,37.834 86.675,37.165 87.743,37.165 88.673,36.235 v1(88.696,36.235) ; R67.2@88.965,44.072 v1(88.965,41.045) 89.055,40.955 R65.2@89.055,40.205
  Bottom Layer w0.152: v2(59.665,47.995) 60.514,47.146 61.233,47.146 64.258,44.121 64.258,37.881 v1(64.211,37.834) ; v1(88.696,36.235) 88.965,36.504 v1(88.965,41.045)
M1_OA1: M5.1 U9.34 | length 87.4
  Top Layer w0.254: 66.842,53.716 66.855,53.728
  Top Layer w0.3: U9.34@65.604,53.716 66.842,53.716
  Top Layer w0.762: M5.1@3.361,67.936 5.206,66.091 12.04,66.091 15.787,62.343 17.309,62.343 18.018,63.052 31.989,63.052 44.061,50.98 50.924,50.98 57.675,44.229 66.861,44.229 70.453,47.82 70.453,48.444 70.477,48.469 70.477,51.687 v1@68.172,53.992
  other v1: 67.385,53.826 68.18,53.846 67.405,54.456 68.195,54.466
M1_OA2: M5.2 U9.32 | length 80.2
  Top Layer w0.3: U9.32@65.604,52.716 66.804,52.716
  Top Layer w0.762: v3(16.332,63.678) 16.621,63.966 32.368,63.966 44.44,51.894 51.302,51.894 58.054,45.143 66.482,45.143 69.538,48.199 69.538,48.823 69.563,48.847 69.563,51.308 68.661,52.21
  Bottom Layer w0.762: M5.2@5.901,67.936 7.806,66.031 12.022,66.031 14.376,63.678 v3(16.332,63.678)
  other v1: 68.395,51.928 67.575,51.946 67.275,52.483 68.165,52.485
M1_OB1: M5.3 U9.13 | length 58.6
  Top Layer w0.3: 58.235,54.026 58.694,54.026 59.004,53.716 U9.13@59.705,53.716
  Top Layer w0.762: v3(16.18,66.319) 16.317,66.319 16.841,65.795 33.125,65.795 45.192,53.728 55.851,53.728 56.168,54.046 58.215,54.046 58.235,54.026
  Bottom Layer w0.762: M5.3@8.441,67.936 9.872,69.367 12.075,69.367 15.123,66.319 v3(16.18,66.319)
  other v1: 56.355,53.575 57.15,53.595 56.375,54.205 57.165,54.215
M1_OB2: M5.4 U9.15 | length 55.4
  Top Layer w0.254: 58.164,52.325 58.244,52.405 58.535,52.405
  Top Layer w0.3: 58.535,52.405 58.846,52.716 U9.15@59.705,52.716
  Top Layer w0.762: M5.4@10.981,67.936 11.965,67.936 15.021,64.881 32.747,64.881 44.819,52.809 55.751,52.809 56.235,52.325 57.139,52.325 58.164,52.325
  other v1: 56.344,52.196 57.139,52.216 56.364,52.826 57.154,52.836
M1_STEP1: 6_M1_STEP.1 CN10.28 U9.6 | length 33.2
  Top Layer w0.152: U9.6@62.403,55.387 62.403,57.207 62.207,57.403 62.207,57.915 ; 6_M1_STEP.1@63.345,57.915 62.207,57.915 ; CN10.28@79.375,67.259 78.269,68.365 63.396,68.365 63.01,67.979 63.01,66.772 62.091,65.854 60.998,65.854 60.45,65.306 60.45,63.918 62.207,62.161 62.207,57.915
M1pwm: CN10.30 U3.15 U4.1 | length 80.6
  Top Layer w0.152: v1(39.535,42.085) 39.939,41.681 48.625,41.681 49.01,42.066 49.762,42.066 50.105,41.723 v1(51.079,41.723)
  Top Layer w0.254: U3.15@29.552,45.627 30.361,45.627 v1(30.658,45.923) ; U4.1@35.076,44.298 v1(36.03,44.298)
  Bottom Layer w0.152: v1(36.03,44.298) 38.243,42.085 v1(39.535,42.085) ; v1(51.079,41.723) 50.487,42.315 50.487,43.517 50.686,43.716 50.686,45.21 49.33,46.566 49.33,59.194 51.045,60.909 68.909,60.909 71.12,63.121 73.558,63.121 74.045,62.634 79.354,62.634 80.435,63.715 80.435,65.779 CN10.30@81.915,67.259
  Bottom Layer w0.254: v1(30.658,45.923) 34.405,45.923 v1(36.03,44.298)
M1pwmN: U3.16 U4.6 | length 9.8
  Top Layer w0.152: U3.16@29.552,46.277 29.524,46.305 29.524,46.544 29.705,46.725 v1(30.585,46.725) ; U4.6@37.102,44.321 v1(37.102,45.321)
  Bottom Layer w0.152: v1(30.585,46.725) 35.066,46.725 35.382,47.041 v1(37.102,45.321)
M2+: J3.2 U3.7 | length 16.1
  Top Layer w0.152: J3.2@14.859,51.791 J3.2@14.859,51.943
  Top Layer w0.406: J3.2@14.859,51.791 16.154,50.495 16.154,48.844 16.891,48.108 18.263,48.108 19.177,47.193 19.177,43.078 19.879,42.377 U3.7@23.552,42.377
M2-: J3.5 U3.5 | length 12.6
  Top Layer w0.152: v3(20.218,43.612) v3@20.283,43.677
  Top Layer w0.406: v3@20.283,43.677 U3.5@23.552,43.677
  Bottom Layer w0.406: J3.5@14.859,49.403 16.18,48.082 18.263,48.082 19.177,47.168 19.177,44.653 v3(20.218,43.612)
M2_CFG_0: J10.1 U10.5 | length 11
  Top Layer w0.152: v1(75.392,56.985) 75.392,57.848 J10.1@76.369,58.825 ; v1(79.655,52.035) 79.655,51.985 79.96,51.68 U10.5@79.96,50.736
  Bottom Layer w0.152: v1(75.392,56.985) 75.83,56.547 75.83,56.069 77.028,54.871 78.149,54.871 79.655,53.365 v1(79.655,52.035)
M2_CFG_1: J12.1 U10.4 | length 9.2
  Top Layer w0.152: v1(78.571,55.495) 78.571,58.035 J12.1@79.361,58.825 ; v1(80.445,52.065) 80.46,52.05 U10.4@80.46,50.736
  Bottom Layer w0.152: v1(78.571,55.495) 80.445,53.621 v1(80.445,52.065)
M2_CFG_2: J11.1 U10.3 | length 8.7
  Top Layer w0.152: U10.3@80.96,50.736 80.96,51.732 v1(81.263,52.035) ; v1(81.705,54.965) 81.655,54.965 81.645,54.975 81.645,58.268 82.202,58.825 J11.1@82.165,58.825
  Bottom Layer w0.152: v1(81.263,52.035) 81.263,54.523 v1(81.705,54.965)
M2_CFG_3: J13.1 U10.2 | length 9.7
  Top Layer w0.152: U10.2@81.46,50.736 81.46,51.346 v1(82.109,51.995) ; v1(83.855,55.925) 84.325,56.395 84.325,58.137 85.013,58.825 J13.1@85.013,58.937
  Bottom Layer w0.152: v1(82.109,51.995) 83.855,53.741 v1(83.855,55.925)
M2_CFG_6: J9.1 U10.22 | length 24.9
  Top Layer w0.152: v1(72.4,57.6) 72.442,57.642 72.442,58.155 J9.1@73.108,58.821 ; v1(75.685,42.405) 75.925,42.405 78.96,45.44 U10.22@78.96,45.836
  Bottom Layer w0.152: v1(72.4,57.6) 72.4,55.354 74.979,52.775 74.975,52.775 77.114,50.636 77.114,45.547 76.833,45.266 76.38,45.266 75.166,44.053 75.166,42.924 v1(75.685,42.405)
M2_DIR1: 7_DIR_2.1 CN7.17 U10.7 | length 130.3
  Top Layer w0.152: CN7.17@66.675,3.759 67.691,4.775 70.454,4.775 70.459,4.78 75.045,4.78 75.555,4.271 75.555,3.328 77.008,1.875 108.173,1.875 109.322,3.023 109.322,52.072 108.583,52.81 102.919,52.81 102.916,52.813 95.239,52.813 95.236,52.81 87.558,52.81 86.283,54.085 79.025,54.085 78.645,53.705 ; 7_DIR_2.1@77.685,54.03 78.32,54.03 78.645,53.705 ; U10.7@78.872,50.825 78.872,52.095 78.365,52.602 78.365,53.425 78.645,53.705
M2_Driver_error: R21.2 R25.2 U10.20 | length 25.2
  Top Layer w0.152: v1(75.645,43.855) 76.278,43.855 77.96,45.537 U10.20@77.96,45.836 ; R25.2@89.941,44.072 89.978,44.035 89.978,41.072 v1(90.015,41.035) 90.051,40.999 90.051,40.216 R21.2@90.088,40.18
  Bottom Layer w0.152: v1(75.645,43.855) 75.955,43.855 76.539,43.271 76.539,41.629 76.859,41.309 85.018,41.309 86.416,42.707 88.753,42.707 90.015,41.445 v1(90.015,41.035)
M2_Index_pulse: R19.2 R23.2 U10.21 | length 27
  Top Layer w0.152: v1(75.715,43.155) 76.175,43.155 78.421,45.401 78.421,45.797 U10.21@78.46,45.836 ; R23.2@90.945,44.065 91.075,43.935 v1(91.075,41.105) 91.135,41.045 R19.2@91.135,40.195
  Bottom Layer w0.152: v1(75.715,43.155) 76.164,42.707 76.164,41.573 76.733,41.004 85.145,41.004 86.542,42.402 88.591,42.402 89.536,41.456 89.536,40.837 89.817,40.556 90.766,40.556 91.075,40.865 v1(91.075,41.105)
M2_OA1: M4.1 U10.34 | length 105.8
  Top Layer w0.152: 83.881,49.07 83.925,49.114
  Top Layer w0.3: U10.34@82.615,49.07 83.881,49.07
  Top Layer w0.762: M4.1@3.336,64.711 6.259,61.787 8.644,61.787 8.87,61.561 11.303,61.561 14.241,58.623 19.415,58.623 20.187,59.394 30.474,59.394 42.55,47.318 49.413,47.318 56.16,40.571 67.691,40.571 69.349,38.913 85.095,38.913 87.025,40.843 87.025,49.085 86.735,49.375
  other v1: 85.625,48.892 86.334,48.905 85.625,49.545 86.335,49.545
M2_OA2: M4.2 U10.32 | length 99.9
  Top Layer w0.152: 83.813,48.07 83.815,48.072
  Top Layer w0.3: U10.32@82.615,48.07 83.813,48.07
  Top Layer w0.762: M4.2@5.876,64.711 7.885,62.701 9.022,62.701 9.249,62.475 11.682,62.475 14.619,59.538 18.884,59.538 19.655,60.309 30.853,60.309 42.925,48.237 49.787,48.237 56.539,41.485 68.07,41.485 69.728,39.827 84.716,39.827 86.111,41.222 86.111,47.163 v1(85.393,47.881)
  other v1: 85.387,47.295 84.558,47.309 84.558,47.845
M2_OB1: M4.3 U10.13 | length 80.9
  Top Layer w0.3: 75.07,49.364 75.119,49.315 75.602,49.315 75.846,49.07 U10.13@76.715,49.07
  Top Layer w0.381: v1@74.158,49.349 v1@74.2,49.391
  Top Layer w0.762: M4.3@8.416,64.711 8.635,64.711 9.001,64.345 9.255,64.345 10.21,63.39 12.06,63.39 14.998,60.452 18.212,60.452 18.983,61.223 31.232,61.223 43.304,49.151 50.166,49.151 56.918,42.4 67.618,42.4 72.544,47.326 72.544,47.352 72.833,47.641 72.833,48.609 73.538,49.349 74.07,49.349 v1@74.158,49.349
  other v1: 73.275,49.32 74.07,49.34 73.295,49.95 74.085,49.96
M2_OB2: M4.4 U10.15 | length 77.4
  Top Layer w0.152: v3(74.002,47.589) 74.306,47.589 v3@74.366,47.649 ; 74.947,47.78 75.414,47.78
  Top Layer w0.3: 75.414,47.78 75.437,47.78 75.728,48.07 U10.15@76.715,48.07
  Top Layer w0.762: M4.4@10.956,64.711 12.033,64.711 15.314,61.429 17.815,61.429 18.524,62.138 31.61,62.138 43.683,50.066 50.545,50.066 57.296,43.314 67.24,43.314 71.396,47.47 71.396,48.036 71.367,48.065 71.427,48.125 v3(71.665,48.125)
  Bottom Layer w0.762: v3(71.665,48.125) 73.291,48.125 73.827,47.589 v3(74.002,47.589)
M2pwm: CN10.21 U3.10 U4.3 | length 65.2
  Top Layer w0.152: U3.10@29.552,42.377 30.25,42.377 v1(30.666,41.961) ; U4.3@35.052,43.021 35.035,43.005 v1(35.035,41.902) 35.235,41.902 35.808,41.329 49.344,41.329 v1(49.536,41.52)
  Bottom Layer w0.152: v1(30.666,41.961) 30.725,41.902 v1(35.035,41.902) ; v1(49.536,41.52) 49.593,41.578 49.593,44.473 48.72,45.347 48.72,59.446 50.793,61.519 68.656,61.519 71.679,64.541 71.679,64.643 CN10.21@71.755,64.719
M2pwmN: U3.9 U4.4 | length 9.7
  Top Layer w0.152: U3.9@29.552,41.727 29.552,41.289 30.048,40.792 v1(30.556,40.792) v1@30.632,40.792 ; v1@37.102,42.095 v1(37.059,42.052) 37.059,42.978 U4.4@37.102,43.021
  Bottom Layer w0.152: v1@30.632,40.792 35.799,40.792 v1(37.059,42.052)
M3+: J3.3 U5.2 | length 6.3
  Top Layer w0.406: J3.3@17.399,51.943 19.787,51.943 20.201,52.358 U5.2@23.552,52.358
M3-: J3.6 U5.4 | length 6.8
  Top Layer w0.406: J3.6@17.399,49.403 19.583,49.403 21.238,51.058 U5.4@23.552,51.058
M3pwm: CN10.33 U5.15 U6.1 | length 90.5
  Top Layer w0.152: U5.15@29.552,52.358 30.209,52.358 30.607,52.756 v1(30.607,52.883) ; U6.1@34.971,49.732 v1@36.044,49.732 ; v1(50.978,43.092) 50.978,42.69 50.659,42.371 48.884,42.371 48.512,41.999 40.711,41.999 40.155,42.555 ; 40.155,42.555 40.155,44.172 v1(40.071,44.172) 40.071,42.639 40.155,42.555
  Bottom Layer w0.152: v1(30.607,52.883) 32.029,52.883 35.255,49.657 v1(36.119,49.657) 36.119,48.124 v1(40.071,44.172) ; v1(50.978,43.092) 50.978,43.148 51.185,43.355 51.185,45.207 49.634,46.758 49.634,59.068 51.138,60.571 69.002,60.571 71.247,62.816 73.432,62.816 73.919,62.329 79.949,62.329 81.323,63.703 82.5,63.703 84.059,62.144 85.898,62.144 86.995,63.241 CN10.33@86.995,64.719
M3pwmN: U5.16 U6.6 | length 10
  Top Layer w0.152: U5.16@29.552,53.008 29.552,53.529 29.947,53.924 v1(30.607,53.924) ; v1(34.739,51.127) 35.722,51.127 U6.6@37.109,49.739
  Bottom Layer w0.152: v1(30.607,53.924) 31.942,53.924 v1(34.739,51.127)
MotorEnable: CN10.26 R4.1 U3.1 U5.1 | length 135.4
  Top Layer w0.152: v1(22.403,47.073) 23.2,46.277 23.569,46.277 24.971,47.678 v1(32.108,47.678) ; v1(22.403,53.391) 23.169,53.391 U5.1@23.552,53.008 ; v1(36.297,46.965) 40.185,46.965 44.541,42.609 47.943,42.609 49.276,43.942 v1(50.14,43.942) 51.345,43.942 55.326,39.961 67.007,39.961 68.761,38.207 86.064,38.207 86.801,37.47 87.869,37.47 88.594,36.745 R4.1@96.414,36.745
  Bottom Layer w0.152: v1(22.403,47.073) v1(22.403,53.391) ; v1(32.108,47.678) 35.583,47.678 v1(36.297,46.965) ; v1(50.14,43.942) 50.14,44.983 49.025,46.098 49.025,59.32 50.919,61.214 68.782,61.214 71.043,63.475 72.144,63.475 73.152,64.483 73.152,65.013 73.874,65.735 74.802,65.735 76.054,66.987 76.563,66.987 CN10.26@76.835,67.259
NetC5_1: C5.1 L3.1 U8.3 | length 1.9
  Top Layer w0.152: v1@60.711,23.833 U8.3@62.636,23.833
  Top Layer w0.254: v1(60.706,23.838) v1@60.711,23.833
  other v1: 64.135,10.757 64.897,10.757 65.659,10.757 66.929,14.44 67.818,14.44 64.008,16.091 64.897,16.091
NetC5_2: C5.2 R5.2 | length 1.8
  Top Layer w0.254: R5.2@66.388,17.894 67.099,17.894 C5.2@67.894,17.099
NetC6_1: C6.1 R6.1 R9.2 R11.2 | length 3.1
  Top Layer w0.152: R9.2@66.541,26.81 C6.1@66.541,29.782
  Top Layer w0.254: C6.1@66.541,29.782 C6.1@66.616,29.858
NetC9_1: C9.1 IMU.24 | length 2.1
  Top Layer w0.152: IMU.24@78.143,33.743 78.143,33.236 79.016,32.363 C9.1@79.016,32.004
NetC10_2: C10.2 IMU.21 | length 4.7
  Top Layer w0.152: C10.2@73.691,33.779 73.691,33.039 73.863,32.868 76.632,32.868 76.853,33.089 IMU.21@76.853,33.743
NetC14_2: C14.2 C16.2 U3.11 U3.14 | length 5.4
  Top Layer w0.152: U3.11@29.552,43.027 31.287,43.027 C16.2@31.287,43.163 C14.2@31.287,44.764 31.287,44.977 U3.14@29.552,44.977
NetC21_2: C21.2 C22.2 U5.11 U5.14 | length 5.2
  Top Layer w0.152: U5.11@29.552,49.758 31.099,49.758 C22.2@31.287,49.945 C21.2@31.287,51.511 31.091,51.708 U5.14@29.552,51.708
NetC29_2: C29.2 U8.7 | length 1.9
  Top Layer w0.152: U8.7@65.236,24.483 C29.2@66.927,24.483
  Top Layer w0.254: C29.2@66.927,24.483 C29.2@67.107,24.303
NetC30_2: C30.2 U8.1 | length 1.4
  Top Layer w0.152: U8.1@62.636,25.133 C30.2@62.636,26.437
  Top Layer w0.254: C30.2@62.594,26.479 C30.2@62.636,26.437
NetC31_1: C31.1 R13.1 U9.25 | length 4.5
  Top Layer w0.152: R13.1@62.79,46.695 63.89,47.795 63.89,48.225 63.405,48.71 U9.25@63.405,50.515
NetC34_1: C34.1 U9.29 | length 1.1
  Top Layer w0.254: U9.29@65.604,51.215 66.275,50.545 C34.1@66.425,50.545
NetC35_1: C35.1 U9.28 | length 3
  Top Layer w0.152: U9.28@64.903,50.556 64.924,50.533 64.937,50.518 64.937,50.514 64.935,50.485 U9.28@64.921,50.239 ; U9.28@64.904,50.515 64.904,49.744 66.125,48.523 C35.1@66.125,48.375
NetC35_2: C35.2 U9.27 | length 2.5
  Top Layer w0.152: U9.27@64.403,50.487 64.403,49.814 65.325,48.892 C35.2@65.325,48.375
NetC53_1: C53.1 R13.2 U9.26 | length 5.7
  Top Layer w0.152: R13.2@63.67,46.695 65.08,46.695 C53.1@65.1,46.715 64.592,47.223 64.592,48.839 63.904,49.526 U9.26@63.904,50.515
NetC55_1: C55.1 R64.1 U10.25 | length 4.1
  Top Layer w0.152: R64.1@79.512,42.185 79.512,42.607 80.49,43.585 80.415,43.66 U10.25@80.415,45.87
NetC56_1: C56.1 U10.28 | length 2.7
  Top Layer w0.152: U10.28@81.915,45.87 81.915,44.995 82.815,44.095 C56.1@82.815,43.579
NetC56_2: C56.2 U10.27 | length 2.5
  Top Layer w0.152: U10.27@81.415,45.87 81.415,44.881 82.015,44.281 C56.2@82.015,43.579
NetC57_1: C57.1 U10.29 | length 1.4
  Top Layer w0.152: U10.29@82.615,46.57 82.615,46.181 C57.1@83.305,45.491
NetC62_1: C62.1 R64.2 U10.26 | length 5.5
  Top Layer w0.152: R64.2@80.392,42.185 80.79,42.185 80.93,42.325 81.205,42.325 ; U10.26@80.915,45.87 80.915,44.785 81.205,44.495 81.205,42.325 ; C62.1@82.13,42.325 81.205,42.325